# Altium PCB connecters.PcbDoc
Units mm, origin at the board's own origin, x right, y up, seen from the top; angles counter-clockwise.
Board outline 50 x 25 mm, 2 copper layers (Top Layer, Bottom Layer); 11 components, 9 nets, 37 pads, 26 vias.
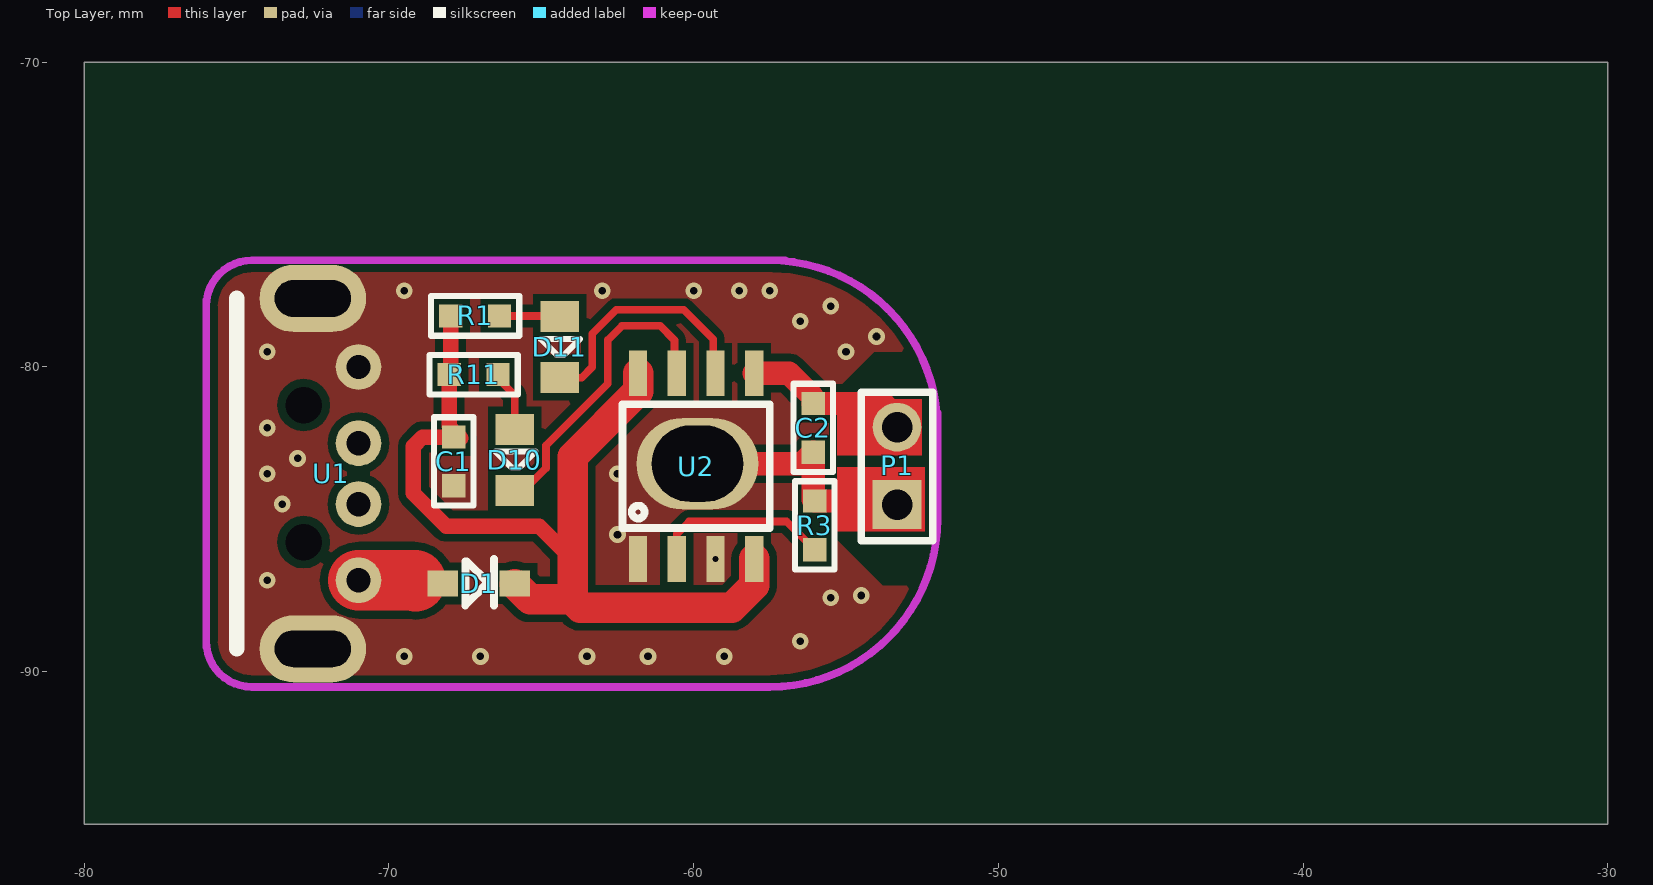
[diagram p0: Top Layer view]
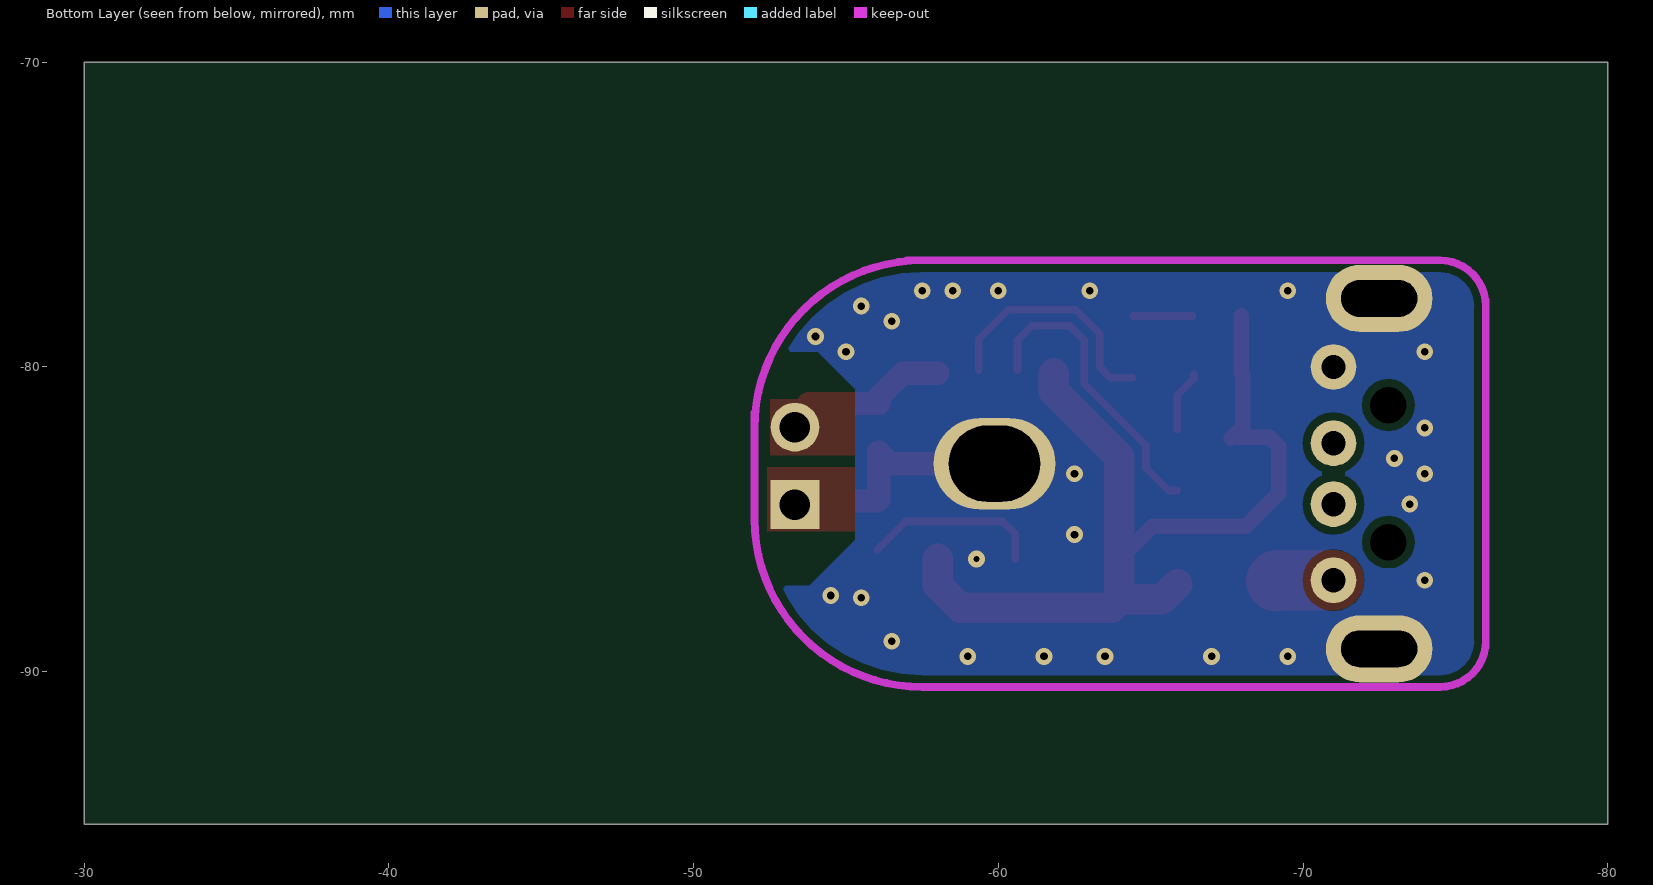
[diagram p1: Bottom Layer view, seen from below]

## Layer stack, top to bottom
Top Layer: signal copper 0.0356
Dielectric: dielectric 0.32, FR-4, Dk 4.8
Bottom Layer: signal copper 0.0356

## Board outline
-80,-70 -80,-95 -30,-95 -30,-70

## Design rules (kind name [scope] priority, off if disabled: settings)
Clearance [All] p1: gap=0.254
ComponentClearance [All] p1 off: gap=0.254 collisioncheckmode=3 verticalgap=0.254 showdistances=FALSE
Height [All] p1 off: minheight=0 maxheight=25.4 prefheight=12.7
HoleToHoleClearance [All] p1 off: gap=0.254 allowstackedmicrovias=TRUE
MinimumSolderMaskSliver [All] p1 off: minsoldermaskwidth=0.254
PlaneConnect [All] p1: planeconnectstyle=Direct reliefexpansion=0.508 reliefentries=4 reliefconductorwidth=0.254 reliefairgap=0.254
PolygonConnect [All] p1: connectstyle=Direct reliefconductorwidth=0.254 reliefentries=4 polygonreliefangle="90 Angle" airgapwidth=0.254
RoutingVias [All] p1: holewidth=0.25 width=0.55 viastyle="Through Hole" minholewidth=0.25 minwidth=0.55 maxholewidth=3 maxwidth=3
SilkToSilkClearance [All] p1 off: silktosilkclearance=0.254
SilkToSolderMaskClearance [IsPad] p1 off: minsilkscreentomaskgap=0.254 clearancetoexposedcopper=TRUE
SolderMaskExpansion [All] p1: expansion=0.102
Width [All] p1: maxlimit=2.54 minlimit=0.254 preferedwidth=0.254 minimp=50.000000 maximp=50.000000 favimp=50.000000
21 further rules are at their usual default settings.

## Components (designator, comment, footprint, x,y, rotation, side; value= is the part's Value field where it differs from the comment)
C1 "C10uF" 0603C -67.875,-82.3 r270 top
C2 "C10uF" 0603C -56.075,-81.2 r270 top
D1 "1N5819WS" LC-SOD-323F -67.05,-87.1 r180 top
D10 "LED-B" LED -65.875,-82.05 r270 top
D11 "LED-R" LED -64.4,-78.35 r270 top
P1 "Head2" HEAD2 -53.325,-81.975 r180 top
R1 "R2K" 0603R -66.375,-78.325 r180 top
R3 "1K" 0603R -56.025,-84.4 r270 top
R11 "R2K" 0603R -66.425,-80.25 r180 top
U1 "USB-A" USB-A -71,-87 r0 top
U2 "TP4056" SOP-8 -61.825,-86.3 r90 top

## Footprints (in the part's own frame and the unit in brackets; to place one, negate y for a bottom-side part, rotate by r counter-clockwise, add the part's x,y. Pads: shape width x height; smd on the part's side, far side on the other; paste and mask are expansions set on the pad)
0603C [mil]
  rect 30x30 smd: 1(0,0) 2(62.99,0)
  silkscreen extent -26,-26 89,26
0603R [mil]
  rect 30x30 smd: 1(0,0) 2(62.99,0)
  silkscreen extent -26,-26 89,26
HEAD2 [mm]
  rect 1.6x1.6 hole 1: 1(0,2.54)
  round 1.6 hole 1: 2(0,0)
  silkscreen extent -1.17,-1.15 1.17,3.72
LC-SOD-323F [mm]
  rect 1x0.83 smd: 1(1.18,0.025) 1(1.18,0) 2(-1.18,0.025) 2(-1.18,0)
  silkscreen extent -0.5,-0.8 0.45,0.72, body extent -1.4,-0.67 1.4,0.68, height 0.75
LED [mil]
  rect 40x50 smd: 1(0,0) 2(78.74,0)
  silkscreen extent 29,-25 49,27
SOP-8 [mm]
  rect 1.5x0.6 smd: 1(0,0) 2(0,-1.27) 3(0,-2.54) 4(0,-3.81) 5(6.096,-3.81) 6(6.096,-2.54) 7(6.096,-1.27) 8(6.096,0)
  silkscreen extent 1.02,-4.32 5.08,0.51
USB-A [mm]
  oval 3.5x2.2 hole 1.2 slot 2.5 at 0 deg: 0(-1.5,-2.25) 0(-1.5,9.25)
  round 1.5 hole 0.8: 1(0,0) 2(0,2.5) 3(0,4.5) 4(0,7)
  round 1 hole 1.2: 5(-1.8,1.25) 5(-1.8,5.75)
  silkscreen extent -4,-2.25 -4,9.25

## Part data
D1: library part 1N5822
D10 D11: library part LED
R1 R11: library part R1K
R3: library part R5K

## Free pads (board coordinates)
  oval 4x3 hole 2.5 slot 3 at 0 deg: 0(-59.875,-83.175)

## Via types
v1: diameter 0.55, hole 0.25, Top Layer to Bottom Layer, 25 vias
v2: diameter 0.55, hole 0.2, Top Layer to Bottom Layer, 1 vias

## Nets (pads, with @x,y where several pads share a name; then routed paths per layer and width w, separated by ;. In a path a pad name is that pad's centre, name@x,y a point inside that pad or via, vN(x,y) a via of type N, cw(c..) or ccw(c..) an arc to the next point about the centre after c; other vN are vias at no path point)
GND: C1.2 C2.2 P1.1 pad.0 R3.1 U1.0 U1.4 U2.1 U2.3 | length 8.4
  Top Layer w0.762: pad.0 -56.45,-83.175 C2.2 -56.075,-84.35 R3.1 -53.535,-84.4 P1.1@-53.325,-84.19
  other v1: -69.5,-89.5 -67,-89.5 -63.5,-89.5 -61.5,-89.5 -59,-89.5 -56.5,-89 -55.5,-87.575 -54.5,-87.5 -74,-87 -62.5,-85.5 -73.5,-84.5 -74,-83.5 -62.5,-83.5 -73,-83 -74,-82 -74,-79.5 -55,-79.5 -54,-79 -56.5,-78.5 -55.5,-78 -69.5,-77.5 -63,-77.5 -60,-77.5 -58.5,-77.5 -57.5,-77.5
  other v2: -59.285,-86.3
NetC1_1: C1.1 D1.2 R1.2 R11.2 U2.4 U2.8 | length 32.3
  Top Layer w0.508: R1.2 -67.975,-80.2 R11.2 -68.025,-81.95 C1.1@-67.637,-82.338 ; C1.1 -68.9,-82.3 -69.2,-82.6 -69.2,-84.15 -68.125,-85.225 -65.075,-85.225 -64,-86.3 -64,-87.625
  Top Layer w1: D1.2@-65.87,-87.125 -65.37,-87.625 -64,-87.625 ; U2.8 -61.825,-80.8 -63.969,-82.944 -63.969,-87.594 -64,-87.625 ; U2.4 -58.015,-87.165 -58.75,-87.9 -63.725,-87.9 -64,-87.625
NetC2_1: C2.1 P1.2 U2.5 | length 5.1
  Top Layer w0.762: U2.5 -56.871,-80.204 C2.1@-56.125,-80.95 ; C2.1 -53.775,-81.2 P1.2@-53.325,-81.65
NetD1_1: D1.1 U1.1 | length 1.9
  Top Layer w2: U1.1 -69.15,-87 -69.125,-87.025
NetD10_1: D10.1 R11.1 | length 2
  Top Layer w0.254: R11.1 -66.425,-80.375 -65.875,-80.925 D10.1
NetD10_2: D10.2 U2.7 | length 9.9
  Top Layer w0.254: D10.2 -65.575,-84.05 -64.85,-83.325 -64.85,-82.579 -62.817,-80.546 -62.817,-79.117 -62.35,-78.65 -61.1,-78.65 -60.63,-79.12 U2.7@-60.63,-80.104
NetD11_1: D11.1 R1.1 | length 2
  Top Layer w0.254: R1.1 D11.1@-64.425,-78.325
NetD11_2: D11.2 U2.6 | length 8
  Top Layer w0.254: D11.2 -63.675,-80.35 -63.325,-80 -63.325,-78.907 -62.543,-78.125 -60.325,-78.125 -59.36,-79.09 U2.6@-59.36,-80.104
NetR3_2: R3.2 U2.2 | length 5.9
  Top Layer w0.254: U2.2 -60.555,-85.48 -60.15,-85.075 -56.95,-85.075 R3.2
pads on no net: U1.2 U1.3 U1.5

## Polygon pours and split planes (outlines as drawn)
GND on Top Layer "Keep-Out Layer-No Net" (solid, remove dead copper, pour order 25): -75.975,-75.525 -75.7,-75.25 -51.35,-75.25 -51.35,-89.4 -49.975,-90.775 -51.025,-91.825 -77.75,-91.825
GND on Bottom Layer "Keep-Out Layer-No Net" (solid, remove dead copper, pour order 27): -75.925,-75.9 -51.625,-75.9 -50.05,-77.475 -49.95,-77.575 -49.95,-93.1 -74.325,-93.1 -76.65,-90.775

## Keep-outs
Keep-Out Layer:
  lines w0.254: -57.5,-76.5 cw(c-57.5,-82) -52,-82 ; -57,-76.5 -74.5,-76.5 ccw(c-74.5,-78) -76,-78 -76,-89 ccw(c-74.5,-89) -74.5,-90.5 -57.5,-90.5 ccw(c-57.5,-85) -52,-85 -52,-81.5

## Other copper
Top Layer:
  rectangle net GND: -55.3,-85.4 -52.4,-83.275
  rectangle net NetC2_1: -55.3,-82.9 -52.5,-81.05
  pour cut-out: -52.65,-79.5 -54.075,-79.5 -55.3,-80.725 -55.3,-85.675 -53.8,-87.175 -52.5,-87.175 -52.5,-86.875 -51.975,-86.35 -51.975,-81.525 -52.2,-81.3 -52.2,-80.325
Bottom Layer:
  pour cut-out: -52.65,-79.5 -54.075,-79.5 -55.3,-80.725 -55.3,-85.675 -53.8,-87.175 -52.5,-87.175 -52.5,-86.875 -51.975,-86.35 -51.975,-81.525 -52.2,-81.3 -52.2,-80.325

## Silkscreen, mask and mechanical layers (free items; w line width, h text height)
Bottom Solder:
  rectangle: -70.3,-89.65 -55.45,-77.25